# EAGLE board ethernet_top_board (EAGLE 9.6.2)
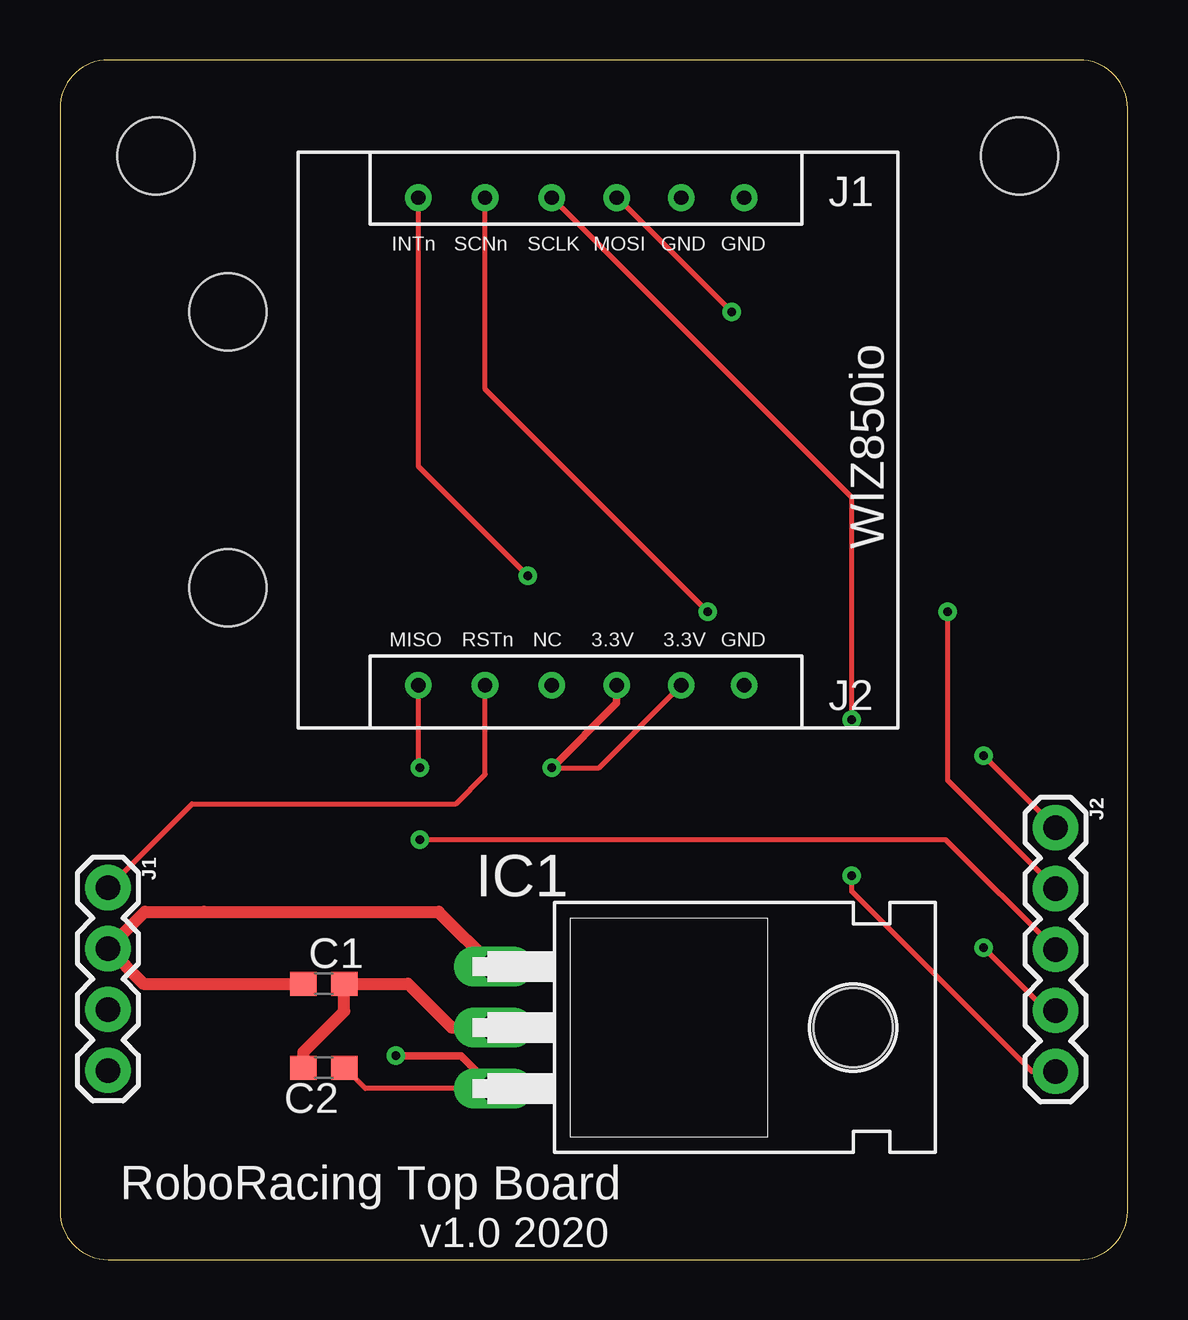
[diagram p0: board, top side]
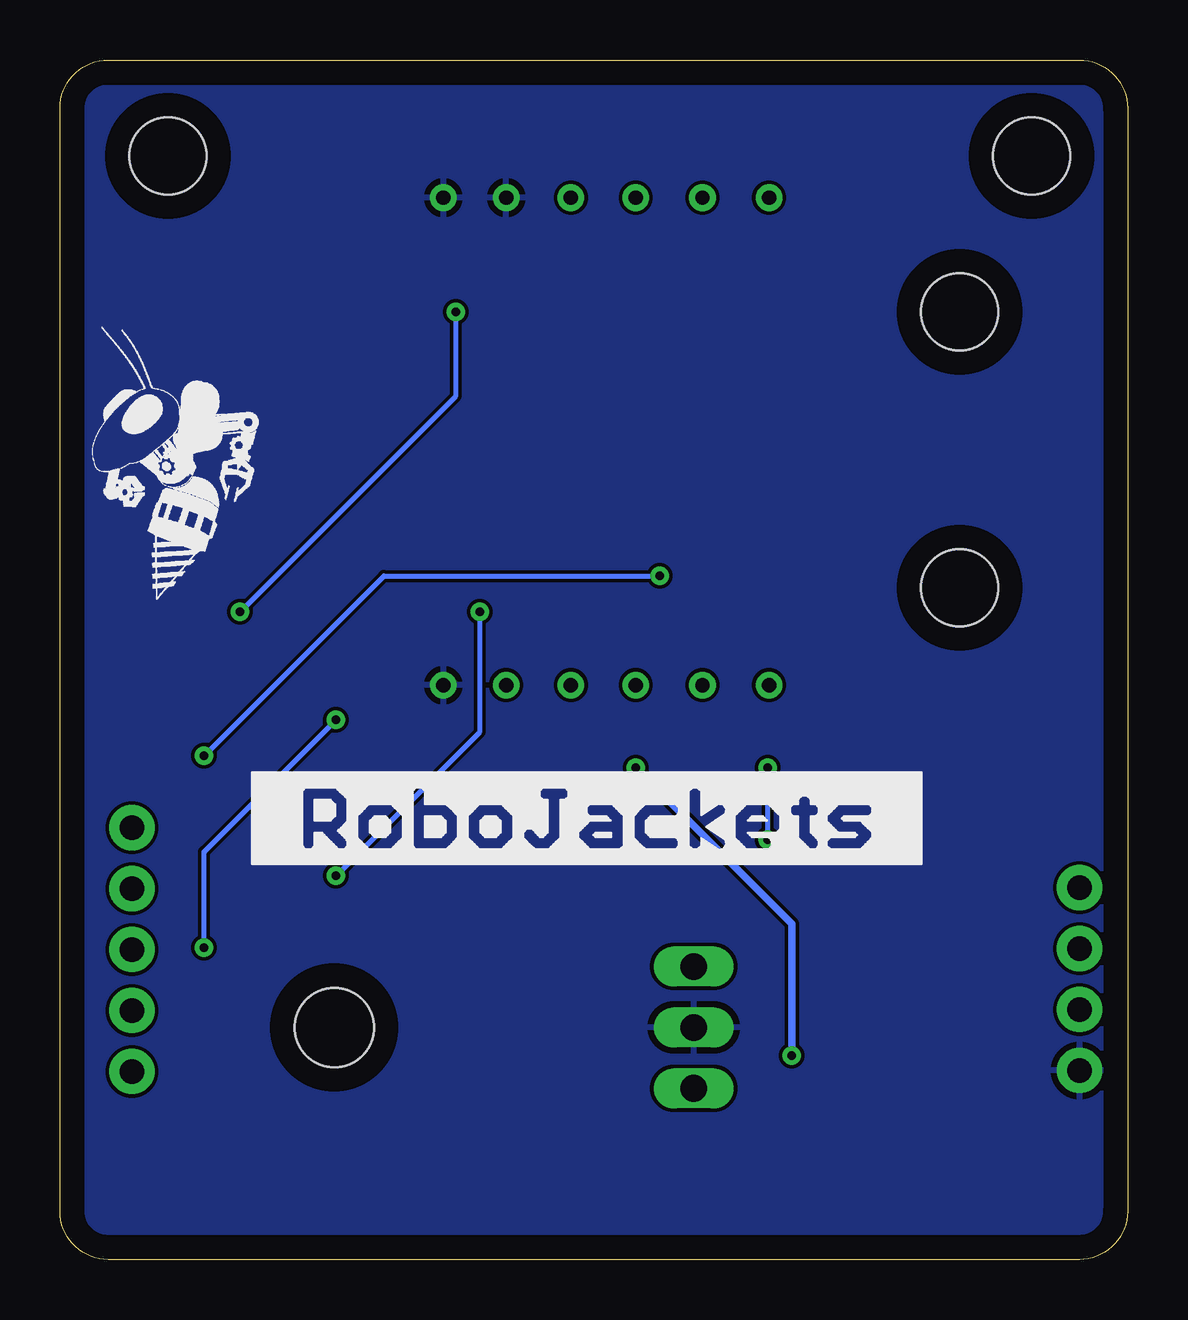
[diagram p1: board, bottom side, seen from below]

Size 44.5 x 50 mm. Coordinates in mm from the lower left corner, seen from the top.
Outline: 0,48 0,2 arc90 2,0 42.5,0 arc90 44.5,2 44.5,48 arc90 42.5,50 2,50 arc90 0,48
Copper layers (1*16): Top 0.035mm / dielectric 1.5mm / Bottom 0.035mm
Design rules "default": minimum track width 6mil, minimum drill 0.35mm, track to track 6mil, track to pad 6mil, pad to pad 6mil, via to via 6mil, smd to smd 6mil, copper to edge 40mil, drill to drill 6mil, minimum pad ring 10mil, minimum via ring 8mil, stop-mask expansion 4mil, vias tented up to drill 0mil, thermal gap 10mil
Holes 3.2 mm at 4,46 40,46 7,28 7,39.5

## Footprints (pad centres in the part's own frame; a part is rotated, then mirrored left to right if it is on the bottom)
C0603 = smd 1.1 x 1: 1 -0.85,0; 2 0.85,0
TO220H = drill 1.118 long: 1 -2.54,-10.16; 2 0,-10.16; 3 2.54,-10.16 | hole 3.302: 0,4.826
1X04 = drill 1.016 pad 1.88: 1 0,0; 2 2.54,0; 3 5.08,0; 4 7.62,0
1X05 = drill 1.016 pad 1.88: 1 0,0; 2 2.54,0; 3 5.08,0; 4 7.62,0; 5 10.16,0
WIZ850IO = drill 0.6: 1 6.4,1.9; 2 9.02,1.9; 3 11.72,1.9; 4 14.42,1.9; 5 17.2,1.9; 6 19.98,1.9; 7 6.4,22.22; 8 9.02,22.22; 9 11.72,22.22; 10 14.42,22.22; 11 17.2,22.22; 12 19.98,22.22

## Placement (x,y rotation side)
C1  0.33 uF  [C0603]  11,11.5 0 top
C2  0.1 uF  [C0603]  11,8 180 top
IC1  LM340H-05  [TO220H]  28.24,9.67 270 top
J1  [1X04]  2,15.5 270 top
J2  [1X05]  41.5,18 270 top
U$1  WIZ850IO  [WIZ850IO]  34.92,46.16 180 top
U$2  [ROBOBUZZ_0.6X]  40.5,27.5 0 bottom
U$3  [ROBOJACKETS]  36.5,16.5 0 bottom

## Library data of the parts
C1 C2 = rcl; SPICEPREFIX: C
IC1 = linear
J1 = SparkFun-Connectors; PROD_ID: CONN-09696
J2 = SparkFun-Connectors
U$1 = WIZ850io
U$2 U$3 = RoboJackets-Aesthetics

## Nets
!INTN: J2.1 U$1.6
!RSTN: J1.1 U$1.11
+3V3: C2.1 IC1.3 U$1.8 U$1.9
+5V: C1.1 IC1.1 J1.2
GND: C1.2 C2.2 IC1.2 J1.4 U$1.1 U$1.2 U$1.7
MISO: J2.3 U$1.12
MOSI: J2.2 U$1.3
SCLK: J2.4 U$1.4
SCNN: J2.5 U$1.5

## Tracks (layer width: path | path; a pad name or v marks a point on that pad's centre or on a via)
!INTN  (via drill 0.35)
  Top 0.203: J2.1 v38.5,21 | v19.5,28.5 14.94,33.06 U$1.6
  Bottom 0.203: v38.5,21 31,28.5 v19.5,28.5
!RSTN
  Top 0.203: J1.1 5.5,19 16.5,19 17.72,20.22 U$1.11
+3V3  (via drill 0.35)
  Top 0.203: IC1.3 12.72,7.13 C2.1 | v20.5,20.5 22.46,20.5 U$1.8
  Top 0.305: IC1.3 16.71,8.5 v14,8.5 | v20.5,20.5 23.2,23.2 U$1.9
  Bottom 0.305: v14,8.5 14,14 v20.5,20.5
+5V
  Top 0.203: 6,14.5
  Top 0.5: IC1.1 15.79,14.5 6,14.5 3.54,14.5 J1.2 3.46,11.5 C1.1
GND
  Top 0.5: C2.2 10.15,8.65 11.85,10.35 C1.2 14.5,11.5 16.33,9.67 IC1.2
  pour Bottom: 0,0 0,49.5 0,50 44.5,50 44.5,0
MISO  (via drill 0.35)
  Top 0.203: J2.3 36.92,17.5 v15,17.5 | v15,20.5 14.94,20.56 U$1.12
  Bottom 0.203: v15,17.5 v15,20.5
MOSI  (via drill 0.35)
  Top 0.203: J2.2 37,19.96 v37,27 | v28,39.5 23.24,44.26 U$1.3
  Bottom 0.203: v37,27 28,36 v28,39.5
SCLK  (via drill 0.35)
  Top 0.203: J2.4 41.12,10.38 v38.5,13 | v33,22.5 33,31.76 U$1.4
  Bottom 0.203: v38.5,13 38.5,17 v33,22.5
SCNN  (via drill 0.35)
  Top 0.203: J2.5 40.5,7.84 33,15.34 v33,16 | v27,27 17.72,36.28 U$1.5
  Bottom 0.203: v33,16 27,22 v27,27

## Text on the board
tPlace: RoboRacing Top Board | v1.0 2020